# EAGLE board hexapod_mk2_leg_v0.0 (EAGLE 9.6.2)
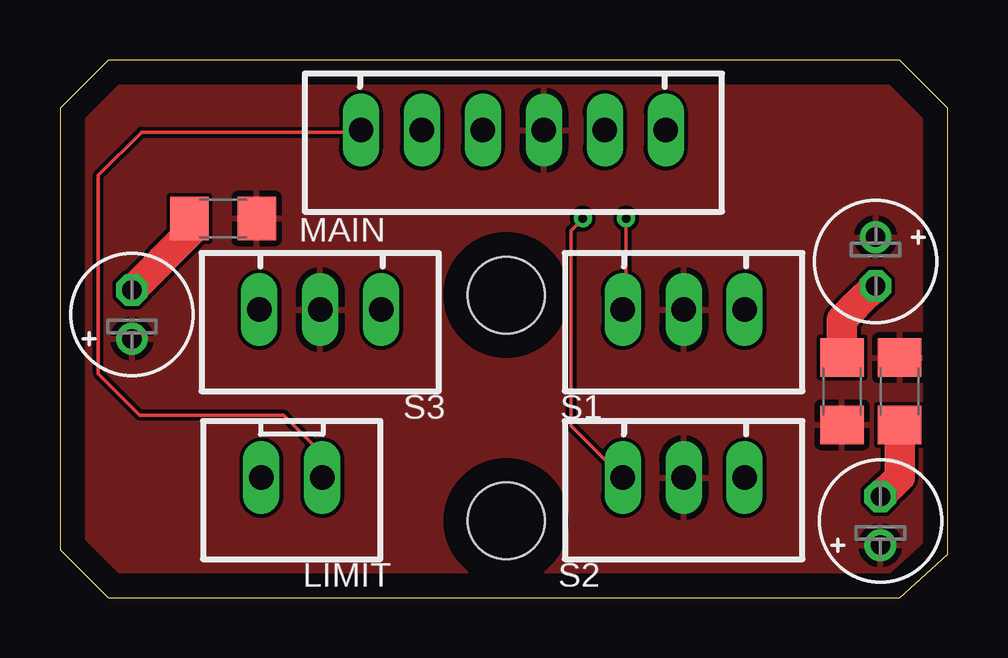
[diagram p0: board, top side]
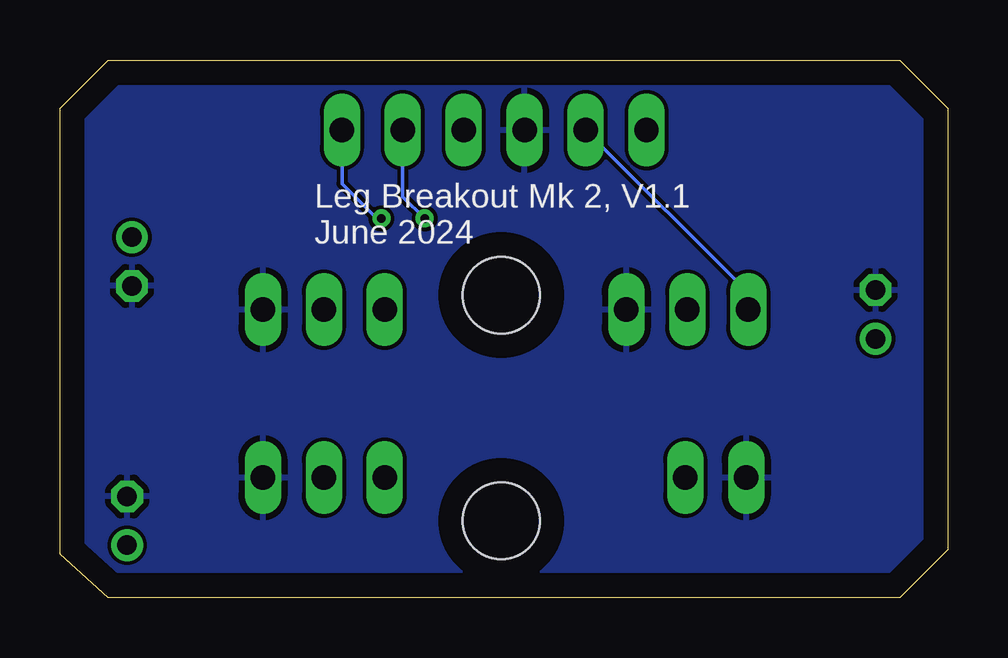
[diagram p1: board, bottom side, seen from below]

Size 37 x 22.4 mm. Coordinates in mm from the lower left corner, seen from the top.
Outline: 0,20.4 0,2 2,0 35,0 37,1.8 37,20.4 35,22.4 2,22.4 0,20.4
Copper layers (1*16): Top 0.035mm / dielectric 1.5mm / Bottom 0.035mm
Design rules "default": minimum track width 6mil, minimum drill 0.35mm, track to track 6mil, track to pad 6mil, pad to pad 6mil, via to via 6mil, smd to smd 6mil, copper to edge 40mil, drill to drill 6mil, minimum pad ring 10mil, minimum via ring 8mil, stop-mask expansion 4mil, vias tented up to drill 0mil, thermal gap 10mil
Holes 3.2 mm at 18.6,12.6 18.6,3.2

## Footprints (pad centres in the part's own frame; a part is rotated, then mirrored left to right if it is on the bottom)
E2-5 = drill 0.813 pad 1.27: + -1.016,0 | drill 0.813 pad 1.27 octagon: - 1.016,0
C1206 = smd 1.6 x 1.8: 1 -1.4,0; 2 1.4,0
JST-XH-02-PACKAGE-LONG-PAD = drill 1.016 long: 1 -1.27,0; 2 1.27,0
JST-XH-06-PACKAGE-LONG-PAD = drill 1.016 long: 1 -6.35,0; 2 -3.81,0; 3 -1.27,0; 4 1.27,0; 5 3.81,0; 6 6.35,0
JST-XH-03-PACKAGE-LONG-PAD = drill 1.016 long: 1 -2.54,0; 2 0,0; 3 2.54,0

## Placement (x,y rotation side)
C1  [E2-5]  3,11.8 90 top
C2  [E2-5]  34,14 270 top
C3  [E2-5]  34.2,3.2 90 top
C4  [C1206]  6.8,15.8 180 top
C5  [C1206]  35,8.6 270 top
C6  [C1206]  32.6,8.6 90 top
LIMIT  JST-XH-02-PIN-LONG-PAD  [JST-XH-02-PACKAGE-LONG-PAD]  9.66,5 180 top
MAIN  JST-XH-06-PIN-LONG-PAD  [JST-XH-06-PACKAGE-LONG-PAD]  18.9,19.48 180 top
S1  JST-XH-03-PIN-LONG-PAD  [JST-XH-03-PACKAGE-LONG-PAD]  26,12 180 top
S2  JST-XH-03-PIN-LONG-PAD  [JST-XH-03-PACKAGE-LONG-PAD]  26,5 180 top
S3  JST-XH-03-PIN-LONG-PAD  [JST-XH-03-PACKAGE-LONG-PAD]  10.85,12 180 top

## Library data of the parts
C1-C6 = rcl; SPICEPREFIX: C
LIMIT MAIN S1-S3 = Rembrandt Electronics - JST XH Connectors v1-0

## Nets
5V: C1.+ C2.+ C3.+ C4.1 C5.1 C6.1 MAIN.3 S1.2 S2.2 S3.2
GND: C1.- C2.- C3.- C4.2 C5.2 C6.2 LIMIT.2 MAIN.4 S1.1 S2.1 S3.1
LIMIT: LIMIT.1 MAIN.6
S1SIG: MAIN.1 S1.3
S2SIG: MAIN.2 S2.3
S3SIG: MAIN.5 S3.3

## Tracks (layer width: path | path; a pad name or v marks a point on that pad's centre or on a via)
5V
  pour Top: -1,22 35.2,22 37,20.2 37,0.4 0.4,0.4 -1,1.8
GND
  Top 0.152: C4.2 5.4,15.22
  Top 1.27: 5.4,15.22 C1.- | C2.- 33.21,12.19 32.6,11.58 C6.2 | C3.- 35,5.02 C5.2
  pour Bottom: -1.8,22 35,22 37,20 37,2 35.2,0.2 -0.4,0.2 -1.8,1.6
LIMIT
  Top 0.152: MAIN.6 12.47,19.4 3.4,19.4 1.6,17.6 1.6,9.33 3.33,7.6 9.33,7.6 10.93,6 LIMIT.1
S1SIG  (via drill 0.35)
  Top 0.152: v23.6,15.8 23.6,12.14 S1.3
  Bottom 0.152: MAIN.1 25.25,17.25 23.8,15.8 v23.6,15.8
S2SIG  (via drill 0.35)
  Top 0.152: v21.8,15.8 21.29,15.29 21.29,7.17 S2.3
  Bottom 0.152: MAIN.2 22.71,16.71 v21.8,15.8
S3SIG
  Bottom 0.152: S3.3 8.31,12.7 MAIN.5

## Text on the board
tPlace: ⏚ | ⏚ | ⏚ | ⏚ | ⏚
bPlace: Leg Breakout Mk 2, V1.1 / June 2024